# Altium PCB 直流无刷电机V2.0.PcbDoc
Units mil, origin at the board's own origin, x right, y up, seen from the top; angles counter-clockwise.
Board outline 2974.23 x 714.2 mil, 2 copper layers (Top Layer, Bottom Layer), stack 61.756 mil thick; 38 components, 31 nets, 151 pads, 50 vias.
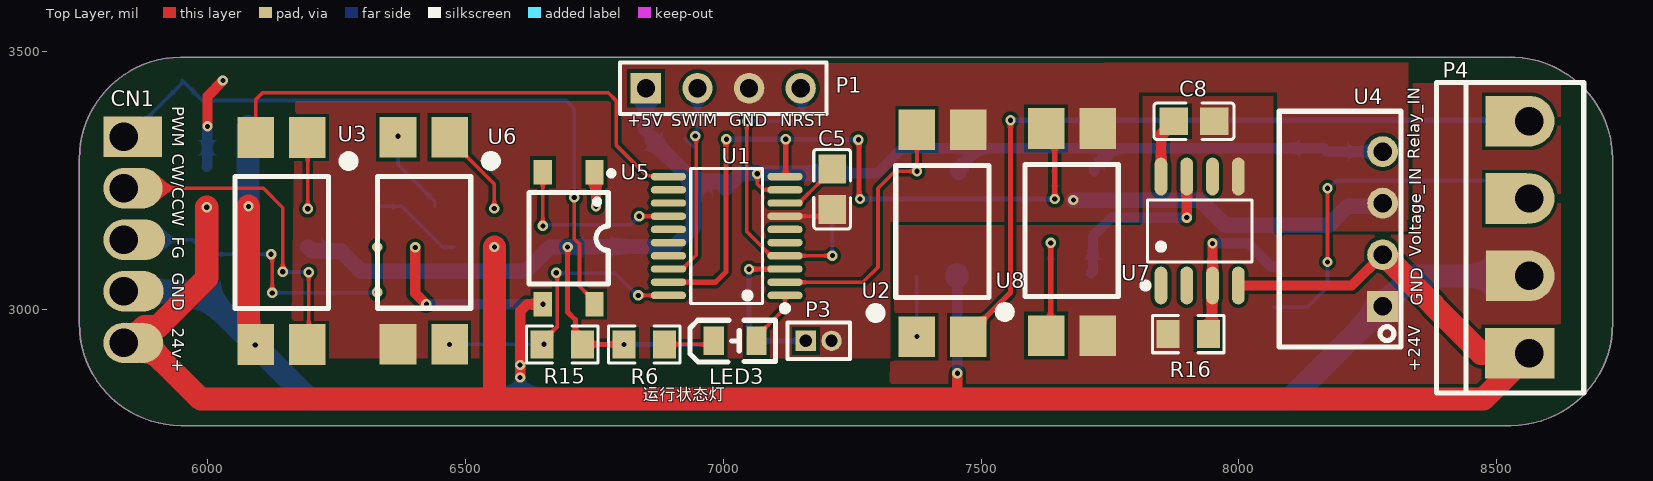
[diagram p0: Top Layer view]
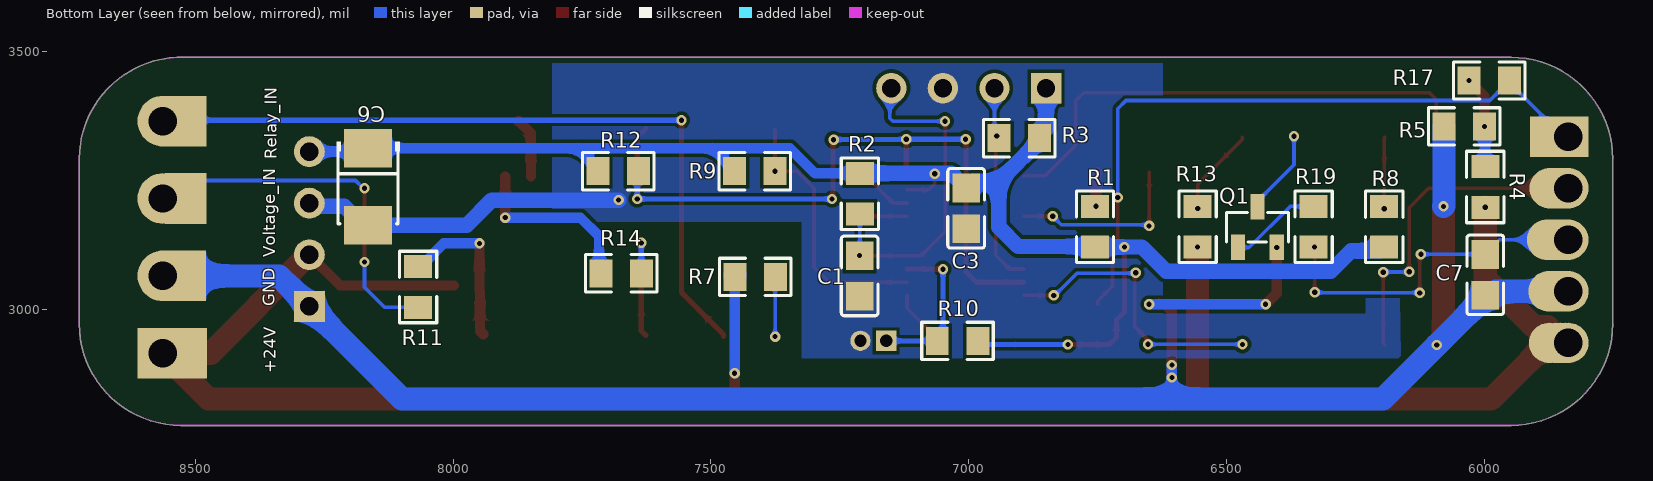
[diagram p1: Bottom Layer view, seen from below]

## Layer stack, top to bottom
Top Solder: solder mask 1, SM-001, Dk 4
Top Layer: signal copper 1.378
Dielectric 1: core 59, Core-043, Dk 4.3
Bottom Layer: signal copper 1.378
Bottom Solder: solder mask 1, SM-001, Dk 4

## Board outline
5750.88,2971.85 ccw(c5948,2971.85) 5947.99,2774.74 ccw(c5948,2775) 5948,2774.73 8528,2774.74 ccw(c8528,2971.85) 8725.12,2971.85 8725.12,3291.82 ccw(c8528,3291.82) 8535.23,3488.8 ccw(c8535,3488.67) 8535,3488.94 5948,3488.94 ccw(c5948,3488.67) 5947.99,3488.94 ccw(c5948,3291.82) 5750.88,3291.82

## Design rules (kind name [scope] priority, off if disabled: settings)
Clearance [All] p1: gap=7 ignorepadtopadclearanceinfootprint=FALSE
ComponentClearance [All] p1: gap=5 collisioncheckmode=3 verticalgap=5 showdistances=FALSE
PlaneConnect [All] p1: planeconnectstyle=Direct reliefexpansion=20 reliefentries=4 reliefconductorwidth=10 reliefairgap=10
PolygonConnect [All] p1: connectstyle=Direct reliefconductorwidth=10 reliefentries=4 polygonreliefangle="90 Angle" airgapwidth=10
RoutingVias [All] p1: holewidth=14 width=25 viastyle="Through Hole" minholewidth=5 minwidth=5 maxholewidth=14 maxwidth=25
SolderMaskExpansion [All] p1: expansion=4 istentingtop=FALSE
Width [All] p1: maxlimit=50 minlimit=7 preferedwidth=10
28 further rules are at their usual default settings.

## Components (designator, comment, footprint, x,y, rotation, side; value= is the part's Value field where it differs from the comment)
C1 "104" C0805 7211.59,3064.91 r270 bottom
C3 "104" C0805 7005,3196 r270 bottom
C5 "105" C0805 7211,3233 r90 top
C6 "CA45-B010K476T" CAP-SMD_L3.5-W2.8-R-RD 8165,3238 r90 bottom value=47uF
C7 "104" C0805 5998,3067 r90 bottom
C8 "105" C0805 7913,3365 r180 top
CN1 "DB2EVC-2.54-5P-GN" CONN-TH_5P-P2.54_DIBO_DB2EVC-2.54-5P-GN 5837,3135 r90 top
LED3 "17-21/R6C-AQ2R2B/3T" LED0805-R-RD 7023,2939 r0 top
P1 "Header 4" HDR1X4 6850,3429 r0 top
P3 "MHDR1X2" MHDR1X2 7160,2939 r0 top
P4 "Header 4" CONN-TH_XY340V-3.81-3P 8541,3215 r270 top locked
Q1 "BC817_C2137" SOT-23-3_L2.9-W1.3-P1.90-LS2.4-BR 6440,3199 r180 bottom
R1 "ERJPB6B1001V" R0805 6755.12,3160.37 r270 bottom
R2 "10K" R0805 7211.06,3224.65 r270 bottom
R3 "10K" R0805 6902,3332 r180 bottom
R4 "ERJPB6B1001V" R0805 5998,3237.37 r270 bottom
R5 "ERJPB6B1001V" R0805 6039,3355 r180 bottom
R6 "ERJPB6B1001V" R0805 6847,2932.06 r180 top
R7 "RN73H2ATTD2001B10" R0805 7414,3063 r0 bottom value=2kΩ
R8 "ERJPB6B1001V" R0805 6194.11,3159.96 r270 bottom
R9 "RTT05472JTP" R0805 7415,3268 r0 bottom value=4.7kΩ
R10 "ERJPB6B1001V" R0805 7021.65,2939 r180 bottom
R11 "ERJPB6B1001V" R0805 8068,3043.37 r270 bottom
R12 "RTT05472JTP" R0805 7680,3268 r0 bottom value=4.7kΩ
R13 "ERJPB6B1001V" R0805 6556,3160.37 r270 bottom
R14 "RN73H2ATTD2001B10" R0805 7674,3070 r0 bottom value=2kΩ
R15 "RTT05472JTP" R0805 6687.63,2932.06 r0 top value=4.7kΩ
R16 "ERJPB6B1001V" R0805 7902,2952 r0 top
R17 "ERJPB6B1001V" R0805 5990,3444 r0 bottom
R19 "0805W8F8002T5E" R0805 6331,3160.37 r90 bottom value=80kΩ
U1 "STM8S003F3P6" TSSOP-20_L6.5-W4.4-P0.65-LS6.4-BL 7006.59,3142.28 r90 top locked
U2 "PC817C_C2936043" SOP-4_L6.5-W4.6-P2.54-LS10.2-TL 7425.5,3148 r90 top
U3 "PC817C_C2936043" SOP-4_L6.5-W4.6-P2.54-LS10.2-TL 6143.11,3132.59 r270 top locked
U4 "B2405S-2W" PWRM-TH_B2405S-1WR2 8279,3156 r90 top locked
U5 "CYTLP181(GB-TP)" SOP-4_L3.9-W4.4-P2.54-LS7.0-BR 6700,3138 r90 top locked
U6 "PC817C_C2936043" SOP-4_L6.5-W4.6-P2.54-LS10.2-TL 6419.04,3133 r270 top locked
U7 "GP9303-F500-N-SW" SOP-8_L4.9-W3.9-P1.27-LS6.0-BL 7924,3152 r0 top locked
U8 "PC817C_C2936043" SOP-4_L6.5-W4.6-P2.54-LS10.2-TL 7676,3150 r90 top locked

## Footprints (in the part's own frame and the unit in brackets; to place one, negate y for a bottom-side part, rotate by r counter-clockwise, add the part's x,y. Pads: shape width x height; smd on the part's side, far side on the other; paste and mask are expansions set on the pad)
C0805 [mm]
  rect 1.41x1.35 smd mask+0.051: 1(-1,0) 2(1,0)
  silkscreen extent -1.96,-0.9 1.96,0.9
CAP-SMD_L3.5-W2.8-R-RD [mm]
  rect 1.9x2.376 smd paste+0 mask+0.051: 1(1.899,0) 2(-1.899,0)
  silkscreen extent -1.83,-1.55 2.21,1.55
CONN-TH_5P-P2.54_DIBO_DB2EVC-2.54-5P-GN [mm]
  rect 2x2 all layers, no hole mask+0.05: 1(5.08,-0.889)
  rect 2x2 hole 1.4 mask+0.05: 1(5.08,0)
  round 2 all layers, no hole mask+0.05: 2(2.54,-0.914) 2(2.54,-0.762) 2(2.54,-0.61) 2(2.54,-0.61) 2(2.54,-0.457) 2(2.54,-0.305) 2(2.54,-0.152) 3(0,-0.178) 3(0,-0.178) 3(0,-0.406) 3(0,-0.61) 3(0,-0.838) 3(0,-0.838) 3(0,-1.041) 4(-2.54,-0.965) 4(-2.54,-0.965) 4(-2.54,-0.762) 4(-2.54,-0.533) 4(-2.54,-0.33) 4(-2.54,-0.127) 5(-5.08,-0.94) 5(-5.08,-0.635) 5(-5.08,-0.381) 5(-5.08,-0.152)
  round 2 hole 1.4 mask+0.05: 2(2.54,0) 3(0,0) 4(-2.54,0) 5(-5.08,0)
CONN-TH_XY340V-3.81-3P [mm]
  rect 2.5x1.27 all layers, no hole: 1(7.62,-0.991)
  rect 2.5x2.5 hole 1.4: 1(7.62,0.559)
  rect 2.5x2.032 all layers, no hole: 2(3.81,-0.559) 3(0,-0.559) 3(0,-0.584) 4(-3.81,-0.584)
  round 2.5 hole 1.4: 2(3.81,0.559) 3(0,0.559) 3(0,0.559) 4(-3.81,0.559)
  silkscreen extent -5.72,-4 9.58,3.25
HDR1X4 [mm] "Connector; Header; 4 Position"
  rect 1.5x1.5 hole 0.9: 1(0,0)
  round 1.5 hole 0.9: 2(2.54,0) 3(5.08,0) 4(7.62,0)
  silkscreen extent -1.27,-1.27 8.89,1.27
LED0805-R-RD [mm]
  rect 1x1.4 smd mask+0.051: 1(1.05,0) 2(-1.05,0)
  silkscreen extent -2.22,-1.04 1.99,1.01
MHDR1X2 [mm] "Connector; Header; 2 Position"
  rect 1x1 hole 0.6: 1(0,0)
  round 1 hole 0.6: 2(1.27,0)
  silkscreen extent -0.9,-0.9 2.17,0.9
PWRM-TH_B2405S-1WR2 [mil]
  rect 60x60 hole 36 paste+0 mask+2: 1(-150,0)
  round 60 hole 36 paste+0 mask+2: 2(-50,0) 3(50,0) 4(150,0)
  silkscreen extent -229,-35 228,201
R0805 [mm]
  rect 1.133x1.377 smd mask+0.051: 1(-1,0) 2(1,0)
  silkscreen extent -1.76,-0.92 1.76,0.92
SOP-4_L3.9-W4.4-P2.54-LS7.0-BR [mm]
  rect 1.199x0.9 smd paste+0 mask+0.051: 1(3.25,-1.27) 2(3.25,1.27) 3(-3.25,1.27) 4(-3.25,-1.27)
  silkscreen extent -2.25,-2.23 3.33,1.95
SOP-4_L6.5-W4.6-P2.54-LS10.2-TL [mm]
  rect 2x1.8 smd mask+0.051: 1(-5.1,1.27) 2(-5.1,-1.27) 3(5.1,-1.27) 4(5.1,1.27)
  silkscreen extent -4.42,-2.29 3.32,3.79
SOP-8_L4.9-W3.9-P1.27-LS6.0-BL [mm]
  oval 0.63x1.865 smd: 1(-1.905,-2.682) 2(-0.635,-2.682) 3(0.635,-2.682) 4(1.905,-2.682) 5(1.905,2.682) 6(0.635,2.682) 7(-0.635,2.682) 8(-1.905,2.682)
  silkscreen extent -2.82,-2.83 2.58,1.52
SOT-23-3_L2.9-W1.3-P1.90-LS2.4-BR [mm]
  rect 0.7x1.25 smd mask+0.051: 1(-0.95,-2) 2(0.95,-2) 3(0,0)
  silkscreen extent -1.53,-1.73 1.53,-0.27
TSSOP-20_L6.5-W4.4-P0.65-LS6.4-BL [mil]
  oval 14.33x68.58 smd paste+0 mask+2: 1(-115.16,-113.03) 2(-89.57,-113.03) 3(-63.98,-113.03) 4(-38.39,-113.03) 5(-12.79,-113.03) 6(12.8,-113.03) 7(38.39,-113.03) 8(63.98,-113.03) 9(89.57,-113.03) 10(115.16,-113.03) 11(115.16,113.03) 12(89.57,113.03) 13(63.98,113.03) 14(38.39,113.03) 15(12.8,113.03) 16(-12.79,113.03) 17(-38.39,113.03) 18(-63.98,113.03) 19(-89.57,113.03) 20(-115.16,113.03)
  silkscreen extent -146,-119 131,70

## Part data
C1 C3 C5 C7 C8: library part CAP, "Capacitor"
C6: Equivalent Series Resistance(ESR)="1Ω 100kHz", JLCPCB Part Class="Extended Part", LCSC Part Name="47uF ±10% 10V", Manufacturer=湘怡中元/湘江, Operating Temperature=-55℃~+125℃, Rated Voltage=10V, Tolerance=±10%, Add into BOM=yes, Convert to PCB=yes, Datasheet=https://atta.szlcsc.com/upload/public/pdf/source/20181017/C123253_E44F021CD80332E438026884F943F9F2.pdf, Device=CA45-B010K476T, Manufacturer Part=CA45-B010K476T, Name=47uF, Supplier=LCSC, Supplier Footprint=CASE-B_3528, Supplier Part=C123253, Symbol=CA45-B010K476T
CN1: Color=绿色, Current Rating (Max)=5A, JLCPCB Part Class="Extended Part", LCSC Part Name="板端/插座-闭口 2.54mm 排数:1 每排P数:5 直针", Manufacturer=DIBO(地博电气), Operating Temperature Range=-40℃~+105℃, Voltage Rating (Max)=150V, Add into BOM=yes, Connector Type=板端/插座-闭口, Contact Material=铜合金, Contact Plating=锡, Convert to PCB=yes, Datasheet=https://atta.szlcsc.com/upload/public/pdf/source/20211210/E15A577DC3E4D22CA3FDFA7356E87168.pdf, Device=DB2EVC-2.54-5P-GN, Manufacturer Part=DB2EVC-2.54-5P-GN, Mounting Style=直针, Name=DB2EVC-2.54-5P-GN, Number of PINs Per Row=5, Number of Rows=1, Pitch=2.54mm, Supplier=LCSC, Supplier Footprint=直插,P=2.54mm, Supplier Part=C2927496, Symbol=DB2EVC-2.54-5P-GN
LED3: Illumination Color=红色, JLCPCB Part Class="Extended Part", Manufacturer=EVERLIGHT(亿光), Add into BOM=yes, Convert to PCB=yes, Datasheet=https://atta.szlcsc.com/upload/public/pdf/source/20170914/C113551_1505373979236968871.pdf, Device=17-21/R6C-AQ2R2B/3T, Dominant Wavelength / Coordinate rank=617.5~633.5nm, LCSC Part Name=17-21/R6C-AQ2R2B/3T, Luminous Intensity (IF=20mA)=90~180mcd, Manufacturer Part=17-21/R6C-AQ2R2B/3T, Mounting Type=表面贴装, Name=17-21/R6C-AQ2R2B/3T, Supplier=LCSC, Supplier Footprint=0805, Supplier Part=C113551, Symbol=17-21/R6C-AQ2R2B/3T
P1 P4: "Header, 4-Pin", LatestRevisionDate=17-Jul-2002, LatestRevisionNote="Re-released for DXP Platform.", Publisher="Altium Limited"
P3: "Header, 2-Pin", LatestRevisionDate=17-Jul-2002, LatestRevisionNote="Re-released for DXP Platform.", Publisher="Altium Limited"
Q1: Collector Current (Ic)=500mA, Collector Cut-Off Current (Icbo)=100nA, Collector-Emitter Breakdown Voltage (Vceo)=45V, Collector-Emitter Saturation Voltage (VCE(sat)@Ic,Ib)=700mV@500mA,50mA, DC Current Gain (hFE@Ic,Vce)=100@100mA,1V, JLCPCB Part Class="Extended Part", LCSC Part Name="NPN 45V 500mA", Manufacturer=CJ(江苏长电/长晶), Manufacturer Part=BC817, Operating Temperature=+150℃@(Tj), Power Dissipation (Pd)=300mW, Transition Frequency (fT)=100MHz, Add into BOM=yes, Convert to PCB=yes, Datasheet=https://atta.szlcsc.com/upload/public/pdf/source/20140809/1457707208989.pdf, Device=BC817_C2137, Name=BC817, Supplier=LCSC, Supplier Footprint=SOT-23, Supplier Part=C2137, Symbol="BC817-16 6A", Transistor Type=NPN
R1: JLCPCB Part Class="Extended Part", LCSC Part Name="2.35KΩ(1001) ±0.1%", Manufacturer=PANASONIC(松下), Add into BOM=yes, Convert to PCB=yes, Datasheet=https://atta.szlcsc.com/upload/public/pdf/source/20190821/C413712_16C6B59B4DECA51D4907C6F5D5BAEAA8.pdf, Device=ERJPB6B1001V, Manufacturer Part=ERJPB6B1001V, Name=ERJPB6B1001V, Supplier=LCSC, Supplier Footprint=0805, Supplier Part=C413712, Symbol=ERJPB6B1001V
R2 R3: library part RES2
R4 R11: JLCPCB Part Class="Extended Part", LCSC Part Name=8.2K, Manufacturer=PANASONIC(松下), Add into BOM=yes, Convert to PCB=yes, Datasheet=https://atta.szlcsc.com/upload/public/pdf/source/20190821/C413712_16C6B59B4DECA51D4907C6F5D5BAEAA8.pdf, Device=ERJPB6B1001V, Manufacturer Part=ERJPB6B1001V, Name=ERJPB6B1001V, Supplier=LCSC, Supplier Footprint=0805, Supplier Part=C413712, Symbol=ERJPB6B1001V
R5 R16: JLCPCB Part Class="Extended Part", LCSC Part Name=2.2K, Manufacturer=PANASONIC(松下), Add into BOM=yes, Convert to PCB=yes, Datasheet=https://atta.szlcsc.com/upload/public/pdf/source/20190821/C413712_16C6B59B4DECA51D4907C6F5D5BAEAA8.pdf, Device=ERJPB6B1001V, Manufacturer Part=ERJPB6B1001V, Name=ERJPB6B1001V, Supplier=LCSC, Supplier Footprint=0805, Supplier Part=C413712, Symbol=ERJPB6B1001V
R6: JLCPCB Part Class="Extended Part", LCSC Part Name=2k, Manufacturer=PANASONIC(松下), Add into BOM=yes, Convert to PCB=yes, Datasheet=https://atta.szlcsc.com/upload/public/pdf/source/20190821/C413712_16C6B59B4DECA51D4907C6F5D5BAEAA8.pdf, Device=ERJPB6B1001V, Manufacturer Part=ERJPB6B1001V, Name=ERJPB6B1001V, Supplier=LCSC, Supplier Footprint=0805, Supplier Part=C413712, Symbol=ERJPB6B1001V
R7: JLCPCB Part Class="Extended Part", LCSC Part Name="2kΩ ±0.1% 125mW", Manufacturer=KOA, Power(Watts)=125mW, Temperature Coefficient=±10ppm/℃, Tolerance=±0.1%, Add into BOM=yes, Convert to PCB=yes, Datasheet=https://atta.szlcsc.com/upload/public/pdf/source/20200909/C782235_A96C5D75DAB930F25D533550B4CBE346.pdf, Device=RN73H2ATTD2001B10, Manufacturer Part=RN73H2ATTD2001B10, Name=2kΩ, Supplier=LCSC, Supplier Footprint=0805, Supplier Part=C782235, Symbol=RN73H2ATTD2001B10
R8 R10: JLCPCB Part Class="Extended Part", LCSC Part Name="1KΩ(1001) ±0.1%", Manufacturer=PANASONIC(松下), Add into BOM=yes, Convert to PCB=yes, Datasheet=https://atta.szlcsc.com/upload/public/pdf/source/20190821/C413712_16C6B59B4DECA51D4907C6F5D5BAEAA8.pdf, Device=ERJPB6B1001V, Manufacturer Part=ERJPB6B1001V, Name=ERJPB6B1001V, Supplier=LCSC, Supplier Footprint=0805, Supplier Part=C413712, Symbol=ERJPB6B1001V
R9 R12 R15: JLCPCB Part Class="Extended Part", LCSC Part Name="4.7kΩ ±5% 125mW", Manufacturer=RALEC(旺诠), Operating Temperature Range=-55℃~+155℃, Overload Voltage (Max)=150V, Power(Watts)=125mW, Temperature Coefficient=±100ppm/℃, Tolerance=±5%, Add into BOM=yes, Convert to PCB=yes, Datasheet=https://atta.szlcsc.com/upload/public/pdf/source/20170408/1491646559888.pdf, Device=RTT05472JTP, Manufacturer Part=RTT05472JTP, Name=4.7kΩ, Supplier=LCSC, Supplier Footprint=0805, Supplier Part=C104350, Symbol=RTT05472JTP, Type=厚膜电阻
R13: JLCPCB Part Class="Extended Part", LCSC Part Name=2K, Manufacturer=PANASONIC(松下), Add into BOM=yes, Convert to PCB=yes, Datasheet=https://atta.szlcsc.com/upload/public/pdf/source/20190821/C413712_16C6B59B4DECA51D4907C6F5D5BAEAA8.pdf, Device=ERJPB6B1001V, Manufacturer Part=ERJPB6B1001V, Name=ERJPB6B1001V, Supplier=LCSC, Supplier Footprint=0805, Supplier Part=C413712, Symbol=ERJPB6B1001V
R14: JLCPCB Part Class="Extended Part", LCSC Part Name="1kΩ ±0.1% 125mW", Manufacturer=KOA, Power(Watts)=125mW, Temperature Coefficient=±10ppm/℃, Tolerance=±0.1%, Add into BOM=yes, Convert to PCB=yes, Datasheet=https://atta.szlcsc.com/upload/public/pdf/source/20200909/C782235_A96C5D75DAB930F25D533550B4CBE346.pdf, Device=RN73H2ATTD2001B10, Manufacturer Part=RN73H2ATTD2001B10, Name=2kΩ, Supplier=LCSC, Supplier Footprint=0805, Supplier Part=C782235, Symbol=RN73H2ATTD2001B10
R17: JLCPCB Part Class="Extended Part", LCSC Part Name="2.4KΩ(1001) ±0.1%", Manufacturer=PANASONIC(松下), Add into BOM=yes, Convert to PCB=yes, Datasheet=https://atta.szlcsc.com/upload/public/pdf/source/20190821/C413712_16C6B59B4DECA51D4907C6F5D5BAEAA8.pdf, Device=ERJPB6B1001V, Manufacturer Part=ERJPB6B1001V, Name=ERJPB6B1001V, Supplier=LCSC, Supplier Footprint=0805, Supplier Part=C413712, Symbol=ERJPB6B1001V
R19: JLCPCB Part Class="Extended Part", LCSC Part Name=1kΩ, Manufacturer=UNI-ROYAL(厚声), Operating Temperature Range=-55℃~+155℃, Overload Voltage (Max)=150V, Power(Watts)=125mW, Temperature Coefficient=±100ppm/℃, Tolerance=±1%, Add into BOM=yes, Convert to PCB=yes, Datasheet=https://atta.szlcsc.com/upload/public/pdf/source/20200306/C422600_1E6D84923E4A46A82E41ADD87F860B5C.pdf, Device=0805W8F8002T5E, Manufacturer Part=0805W8F8002T5E, Name=80kΩ, Supplier=LCSC, Supplier Footprint=0805, Supplier Part=C2767534, Symbol=0805W8F8002T5E, Type=厚膜电阻
U1: JLCPCB Part Class="Extended Part", Manufacturer=ST(意法半导体), Add into BOM=yes, Convert to PCB=yes, Datasheet=https://atta.szlcsc.com/upload/public/pdf/source/20130903/1457706644298.pdf, Device=STM8S003F3P6, LCSC Part Name=STM8S003F3P6, Manufacturer Part=STM8S003F3P6, Name=STM8S003F3P6, Supplier=LCSC, Supplier Footprint=TSSOP-20, Supplier Part=C18615, Symbol=STM8S003F3P6
U2 U3 U6 U8: Collector-Emitter Saturation Voltage (Vce(sat)@Ic,IF)=100mV@1mA,20mA, Forward Voltage=1.2V, Input voltage type=DC, Isolation Voltage(rms)=5kV, JLCPCB Part Class="Extended Part", LCSC Part Name=PC817C, Manufacturer=Slkor(萨科微), Operating Temperature=-40℃~+100℃, Output Current=50mA, Receiving End Voltage=70V, Reverse Voltage=6V, Add into BOM=yes, Convert to PCB=yes, Datasheet=https://atta.szlcsc.com/upload/public/pdf/source/20211223/F034BA3A35BFF661DF174E965ECEB7BD.pdf, Device=PC817C_C2936043, Fall time=3us@2mA,100Ω, Manufacturer Part=PC817C, Name=PC817C, Number of Outputs=1, Output Type=光电三极管, Rise time=4us@2mA,100Ω, Supplier=LCSC, Supplier Footprint=SOP-4-2.54mm, Supplier Part=C2936043, Symbol=PC817C_C2936043
U4: library part B2405S-1W_C3345180, Input Voltage(DC)=21.6V~26.4V, Insulated Voltage=1kV, JLCPCB Part Class="Extended Part", LCSC Part Name="电源模块 模块电源 dcdc模块 24V转5V 1W 隔离模块", Manufacturer=NYBOXING(尼博星), Manufacturer Part=B2405S-1W, Output Power=1W, Output Voltage=5V, Add into BOM=yes, Convert to PCB=yes, Datasheet=https://atta.szlcsc.com/upload/public/pdf/source/20220704/F96432D0D6BB557B5DEFFC115F2CECD6.pdf, Device=B2405S-1W_C3345180, Name=B2405S-1W, Output Channel=1, Supplier=LCSC, Supplier Footprint=插件, Supplier Part=C3345180, Symbol=B2405S-1W_C3345180
U5: JLCPCB Part Class="Extended Part", Manufacturer=OCIC(卓睿), Output-Current(Max)=-, Add into BOM=yes, Convert to PCB=yes, Data Rate=-, Datasheet=https://atta.szlcsc.com/upload/public/pdf/source/20190506/C385054_FAE23A869392FC5336AA394252D11801.pdf, Device=CYTLP181(GB-TP), Input Type=-, LCSC Part Name=CYTLP181(GB-TP), Manufacturer Part=CYTLP181(GB-TP), Name=CYTLP181(GB-TP), Number of Channels=-, Output-Voltage(Max)=-, Product Type=-, Supplier=LCSC, Supplier Footprint=SOP-4_2.54, Supplier Part=C385054, Symbol=CYTLP181(GB-TP2), Voltage-Isolation=-, Voltage-Supply=-
U7: LCSC Part Name=数据转换器ADC, Manufacturer=Guestgood(客益), Add into BOM=yes, Convert to PCB=yes, Datasheet=https://atta.szlcsc.com/upload/public/pdf/source/20230506/4302C737F1DBCCB9206A6988B2EC2060.pdf, Device=GP9303-F500-N-SW, Manufacturer Part=GP9303-F500-N-SW, Name=GP9303-F500-N-SW, Supplier=LCSC, Supplier Footprint=SOP-8, Supplier Part=C5464824, Symbol=GP9303-F500-N-SW

## Via types
v1: diameter 20, hole 10, Top Layer to Bottom Layer, tented both sides, 50 vias

## Nets (pads, with @x,y where several pads share a name; then routed paths per layer and width w, separated by ;. In a path a pad name is that pad's centre, name@x,y a point inside that pad or via, vN(x,y) a via of type N, cw(c..) or ccw(c..) an arc to the next point about the centre after c; other vN are vias at no path point)
5V: C3.1 C6.1 P1.1 R1.2 R2.1 R3.2 R6.2 R8.2 R9.2 R10.2 R12.2 R15.2 U1.9 U4.4 | length 3117.5
  Top Layer w7: v1(7066,3263) 7066,3243.27 7077.41,3231.85 U1.9
  Top Layer w10: v1(6698,3121) 6698,2995 6713,2980 6713,2946.06 R15.2 v1(6807.63,2932.06)
  Bottom Layer w10: v1@6697,3121 v1(6698,3121) ; v1(6807.63,2932.06) 6975.33,2932.06 R10.2
  Bottom Layer w20: R2.1 7215.87,3264.02 7298.21,3264.02 7346.94,3312.75 7496.99,3312.75 ; R9.2@7454.37,3272.81 7466.66,3285.11 7469.34,3285.11 7496.99,3312.75 ; R12.2 7719.37,3272.81 7759.31,3312.75 ; U4.4 8171.75,3306 C6.1 7759.31,3312.75 ; 7496.99,3312.75 7759.31,3312.75
  Bottom Layer w30: R8.2 6201.4,3113.29 6258.19,3113.29 6297.83,3073.65 6616.65,3073.65 6664,3121 v1@6697,3121 ; v1(6698,3121) R1.2 6756.12,3122 6904,3122 6941.69,3159.69 6941.69,3248.13 ; R3.2@6850,3349.44 P1.1 ; R3.2 6862.63,3327.19 6941.69,3248.13 ; C3.1 7005,3236.55 6993.43,3248.13 6941.69,3248.13 ; C3.1@7017.76,3248.13 7033.65,3264.02 7066,3264.02 R2.1 R2.1@7215.87,3264.02 ; R9.2@7454.37,3272.81 R9.2 R9.2@7456.37,3266
5VGND: C1.2 C3.2 C5.1 C6.2 P1.3 P3.2 U1.7 U2.3 U4.3 U6.3 U8.3 | length 734.6
  Top Layer w7: U1.7 7198.04,3180.67 C5.1
  Bottom Layer w30: v1(7679,3212) 7679.1,3211.9 7925.1,3211.9 7973.5,3163.5 8164.75,3163.5 C6.2 8174.37,3163.25 8211.38,3200.26 8273.26,3200.26 U4.3
24VGND: C7.1 C8.1 CN1.4 P4.2 Q1.2 R5.1 R16.1 U3.3 U4.1 U5.3 U7.5 U8.2 | length 4008.4
  Top Layer w20: 6402.3,3031.3 v1@6402.3,3119.96 ; v1(6402.6,3120.26) v1@6402.3,3119.96 ; v1(6424,3010) 6402.3,3031.7 v1@6402.3,3119.96 ; v1(6606,2868) v1(6606,2892) 6606,2910 6606,2996.33 6619.72,3010.05 v1(6650,3010) v1(6650,3010)
  Top Layer w45: v1(6079,3199.89) 6079,2975.03 6080.17,2973.86 6080.17,2942.77 v1(6092.12,2930.82)
  Bottom Layer w20: v1(6424,3010) v1(6650,3010) ; 6606,2826 v1(6606,2868) v1(6606,2892)
  Bottom Layer w45: CN1.4@5837,3035 5842,3035 5850,3035 5858,3035 5867,3035 5875,3035 C7.1@5977.17,3035 ; CN1.4@5878,3034.75 CN1.4@5884.46,3028.29 ; C7.1@5994.65,3028.29 v1(6092.12,2930.82) 6196.94,2826 6606,2826 7803.28,2826 8099,2826 U4.1 8338,3065 8519,3065 P4.2@8563,3065 ; R5.1 6078.37,3200.52 v1(6079,3199.89)
+24V: CN1.5 P4.1 R4.2 R7.2 R13.2 U4.2 U7.4 | length 4327.7
  Top Layer w20: 7431,2826 7432,2827 ; 7454,2826 v1(7454,2876) ; U7.4 8219.39,3046.39 U4.2
  Top Layer w45: CN1.5@5837,2935 5843,2935 5846.13,2935 5877.26,2966.13 5903.53,2966.13 5998,3060.6 v1(5998,3198) ; CN1.5@5878,2934.75 5986.75,2826 6565,2826 ; v1(6556,3121) 6556,2835 6565,2826 ; U4.2 8280.72,3106 8377.38,3009.34 8377.38,3007.62 8470,2915 8502,2915 8563,2915 8474,2826 7454,2826 7431,2826 6565,2826
  Bottom Layer w20: R7.2 7453.69,3062.68 7453.69,2876.32 v1(7454,2876)
  Bottom Layer w45: R7.2@7453.37,3063.29 R7.2@7453.37,3067.4
chenking_self: P3.1 R10.1 U1.3 | length 312.3
  Top Layer w10: v1(7050,3078) 7050.15,3078.15 7119.47,3078.15 U1.3
  Bottom Layer w10: v1(7050,3078) 7050,2950.01 R10.1 P3.1
IN_Relay: P4.4 U2.2 | length 1415.4
  Top Layer w10: U2.2 7475.5,2951.15 7557,3032.65 v1(7557,3367)
  Bottom Layer w10: v1(7557,3367) 8516,3367 P4.4@8518,3365
In_Voltage: P4.3 R11.2 | length 723.9
  Top Layer w7: v1(8172,3092) v1(8172,3235)
  Bottom Layer w7: R11.2 8133,3004 8172,3043 v1(8172,3092) ; v1(8172,3235) 8174.53,3235 8189.53,3250 8513.55,3250 8548.55,3215 P4.3@8563,3215
LED1: LED3.1 U1.1 | length 111
  Top Layer w7: LED3.1 7064.35,2946.86 7119.62,3002.14 U1.1
M_CW/CCW: U1.11 U3.2 | length 997.2
  Top Layer w7: U3.2 6093.1,3407.02 6106.08,3420 6777,3420 6792,3405 6792,3319 6852.15,3258.85 6892.16,3258.85 U1.11
M_FG: C7.2 CN1.3 R19.1 | length 662
  Top Layer w7: v1(6123,3107) 6125.12,3104.88 6125.12,3032.12 v1(6125,3032) ; v1(6328.88,3033.12) 6329.04,3033.27 v1(6329.04,3121)
  Bottom Layer w7: CN1.3@5844,3135 5853,3135 5861,3135 5870,3135 5878,3135 5970.55,3135 5998,3107.55 C7.2 5998.63,3107 v1(6123,3107) ; v1(6125,3032) 6125.56,3032.56 6328.33,3032.56 v1(6328.88,3033.12) ; v1(6329.04,3121) R19.1
M_FG_IN: R15.1 U1.20 U6.4 | length 571.6
  Top Layer w7: R15.1@6648.1,2932.21 R15.1 6648.26,2936.87 6678.22,2966.82 6678.22,3068.78 v1(6676,3071) ; v1(6835,3027.12) U1.20
  Bottom Layer w7: v1@6469.06,2932.23 v1@6652.37,2932.23 ; v1(6676,3071) 6677,3070 6790.12,3070 6833,3027.12 v1(6835,3027.12)
  other v1: 6469.04,2932.21 6652.39,2932.25
M_PWM: U1.14 U5.2 | length 356.2
  Top Layer w7: v1(6650,3162) U5.2 ; v1@6836,3180.67 v1(6837,3180.67) U1.14
  Bottom Layer w7: v1(6650,3162) 6652,3164 6820.33,3164 v1(6837,3180.67)
NetC5_2: C5.2 U1.8 | length 119.8
  Top Layer w7: U1.8 7146.75,3206.26 7187.93,3247.44 7187.93,3249.3 C5.2
NetC8_2: C8.2 U7.8 | length 118.3
  Top Layer w20: U7.8 7849,3341.55 7872.45,3365 C8.2
NetLED3_2: LED3.2 R6.1 | length 98.2
  Top Layer w7: R6.1 6974.71,2932.06 LED3.2
NetQ1_1: Q1.1 R19.2 | length 179.3
  Bottom Layer w7: R19.2 6376.36,3199.74 6455.84,3120.26 Q1.1
NetQ1_3: Q1.3 U6.2 | length 166.2
  Bottom Layer w7: v1(6369.04,3335.76) 6369.04,3280.79 6440,3209.83 Q1.3
NetR1_1: R1.1 U5.1 | length 67.2
  Top Layer w20: U5.1 6753,3262.95 v1(6753,3200)
NetR4_1: R4.1 R5.2 R17.2 | length 180.3
  Top Layer w20: v1(5999.63,3355) 5999.63,3413.64 6029.37,3443.38 v1(6029.37,3444)
  Bottom Layer w20: R4.1 5998.81,3277.55 5998.81,3354.18 v1(5999.63,3355)
NetR7_1: R7.1 U2.1 | length 116.1
  Bottom Layer w7: R7.1 7375.5,3062.13 v1(7375.5,2947.21)
NetR8_1: R8.1 U3.1 | length 142.7
  Top Layer w7: U3.1 6193.91,3332.57 v1(6193.91,3195.19)
  Bottom Layer w7: v1(6193.91,3195.19) 6194.11,3195.39 R8.1
NetR11_1: R11.1 R16.2 U7.3 | length 316.9
  Top Layer w20: R16.2 7948.08,2958.71 7948.08,3033.89 7949,3034.81 U7.3 v1(7949,3128)
  Bottom Layer w20: v1(7949,3128) 8017.93,3128 8063.19,3082.74 R11.1
NetR13_1: R13.1 U6.1 | length 178.3
  Top Layer w7: U6.1 6469.04,3329.85 6555.81,3243.08 v1(6555.81,3195.61)
  Bottom Layer w7: v1(6555.81,3195.61) 6556,3195.8 R13.1
NetR14_1: R14.1 U8.1 | length 242.7
  Top Layer w10: U8.1 7635,2958.2 v1(7635,3129)
  Bottom Layer w10: R14.1 7635,3070.37 v1(7635,3129)
NetR14_2: R14.2 U7.7 | length 350
  Top Layer w20: v1(7899,3178) U7.7
  Bottom Layer w20: R14.2 7717,3073.63 7717,3142 7753,3178 v1(7899,3178)
NRST: C1.1 P1.4 R2.2 U1.4 | length 650
  Top Layer w7: v1(7046,3365) 7045.5,3364.5 7045.5,3150.89 7092.5,3103.89 U1.4 7119.82,3104.09 7211.4,3104.09 v1(7211.59,3104.28)
  Bottom Layer w7: v1(7046,3365) 7147,3365 7153,3371 7153,3426 P1.4 ; R2.2 7211.06,3104.81 v1(7211.59,3104.28)
ON/OFF: R9.1 U1.2 U2.4 | length 515.7
  Top Layer w7: U1.2 7270.71,3052.71 7300,3082 7300,3235 7333,3268 v1(7375.63,3268) 7375.63,3348.66 U2.4
OUT_M_CW/CCW: CN1.2 U3.4 | length 609.4
  Top Layer w7: CN1.2@5873,3235 6108,3235 6145.62,3197.38 v1(6145.62,3073) ; U3.4 6196,2934.7 v1(6196,3072)
  Bottom Layer w7: CN1.2@5878,3234.75 CN1.2@5881.25,3238 ; v1(6145.62,3073) 6146.12,3072.5 6195.5,3072.5 v1(6196,3072)
OUT_M_PWM: CN1.1 R17.1 U5.4 | length 1339.9
  Top Layer w7: v1(6711.01,3217) 6711.01,3136.98 6721,3126.99 6721,3044.93 6750,3015.93 U5.4
  Bottom Layer w7: CN1.1@5837,3335 5872.87,3370.87 5882.31,3370.87 5950.63,3439.19 R17.1 5989.56,3405.07 6694.93,3405.07 6711.01,3388.99 v1(6711.01,3217)
PWM_IN: R12.1 U1.10 U1.19 U8.4 | length 1399.9
  Top Layer w10: U1.19 6984.71,3052.71 7005,3073 7005,3329 v1(7006,3330) ; U1.10 7121,3258.82 v1(7121,3330) ; v1(7262,3329) 7263.5,3327.5 7263.5,3215.5 v1(7265,3214) ; U8.4 7643,3333.79 v1(7643,3214)
  Bottom Layer w10: v1(7006,3330) v1(7121,3330) 7134.5,3330 7135,3329.5 7261.5,3329.5 v1(7262,3329) ; v1(7265,3214) v1(7643,3214) 7643,3265.63 R12.1
SWIM: P1.2 R3.1 U1.18 | length 424
  Top Layer w7: U1.18 6920.69,3078.3 6947.34,3104.96 6947.34,3334.66 v1(6945.69,3336.32)
  Bottom Layer w7: R3.1@6925.74,3332 R3.1@6944.53,3313.21 ; R3.1 v1(6945.69,3336.32) 6950,3340.63 P1.2
pads on no net: U1.5 U1.6 U1.12 U1.13 U1.15 U1.16 U1.17 U7.1 U7.2 U7.6

## Polygon pours and split planes (outlines as drawn)
5VGND on Bottom Layer "5VGND_L02_P000" (solid, remove dead copper, pour order 0): 6167.93,3225.9 6226.82,3225.9 6230.21,3229.29 6230.21,2993.79 6232,2992 6623.22,2992 6623.22,3477 7807,3477 7808,3476 7808,3172 7806,3170 7324,3170 7324,2905 6163,2905 6162,2906
24VGND on Top Layer "24VGND_L01_P007" (solid, pour order 7): 7324,2905 7324,3170 7806,3170 7807,3171 7807,3423 8071.55,3423 8074.28,3420.28 8074.28,3156 8323,3156 8327,3152 8337,3162 8337,3439 8623,3439 8624,3438 8624,2836 7322,2836
5VGND on Top Layer "5VGND_L01_P004" (solid, pour order 4): 7739,3478 8329,3478 8329,3175 8325,3171 8327,3169 8327,3152 8085,3152 8080,3147 8074.28,3152.72 8074.28,3420.28 8075,3421 7743,3421 7739,3425
5VGND on Top Layer "5VGND_L01_P001" (solid, remove dead copper, pour order 1): 6169.68,3401.68 6172,3404 6796,3404 6796,3477 7807,3477 7806,3476 7806,3170 7324,3170 7324,2905 6163,2905 6162,2906

## Keep-outs
Keep-Out Layer:
  lines w0.5: 8528,3488.67 cw(c8528,3291.82) 8724.85,3291.82 8724.85,2971.85 cw(c8528,2971.85) 8528,2775 5948,2775 cw(c5948,2971.85) 5751.15,2971.85 5751.15,3291.82 cw(c5948,3291.82) 5948,3488.67 8535,3488.67

## Silkscreen, mask and mechanical layers (free items; w line width, h text height)
Top Overlay:
  text "PWM" at 5923,3394 h40 r270
  text "+5V" at 6814,3347.89 h40
  text "SWIM" at 6899,3347.44 h40
  text "GND" at 7012,3347.44 h40
  text "NRST" at 7110,3347.44 h40
  text "CW/CCW" at 5923.44,3302 h40 r270
  text "Relay_IN" at 8358.45,3291 h40 r90
  text "FG" at 5923.44,3141 h40 r270
  text "Voltage_IN" at 8361.45,3102 h40 r90
  text "GND" at 5923.44,3071 h40 r270
  text "GND" at 8364.52,3007 h40 r90
  text "24v+" at 5923,2964.04 h40 r270
  text "+24V" at 8360,2879 h40 r90
  text "运行状态灯" at 6844,2815.55 h40
Bottom Overlay:
  text "Relay_IN" at 8334.55,3291 h40 r270
  text "Voltage_IN" at 8337.55,3101 h40 r270
  text "GND" at 8338.48,3006 h40 r270
  text "+24V" at 8336,2876 h40 r270